# Altium PCB Micro_Card.PcbDoc
Units mm, origin at the board's own origin, x right, y up, seen from the top; angles counter-clockwise.
Board outline 55 x 85 mm, 2 copper layers (Top Layer, Bottom Layer); 44 components, 47 nets, 222 pads, 64 vias.
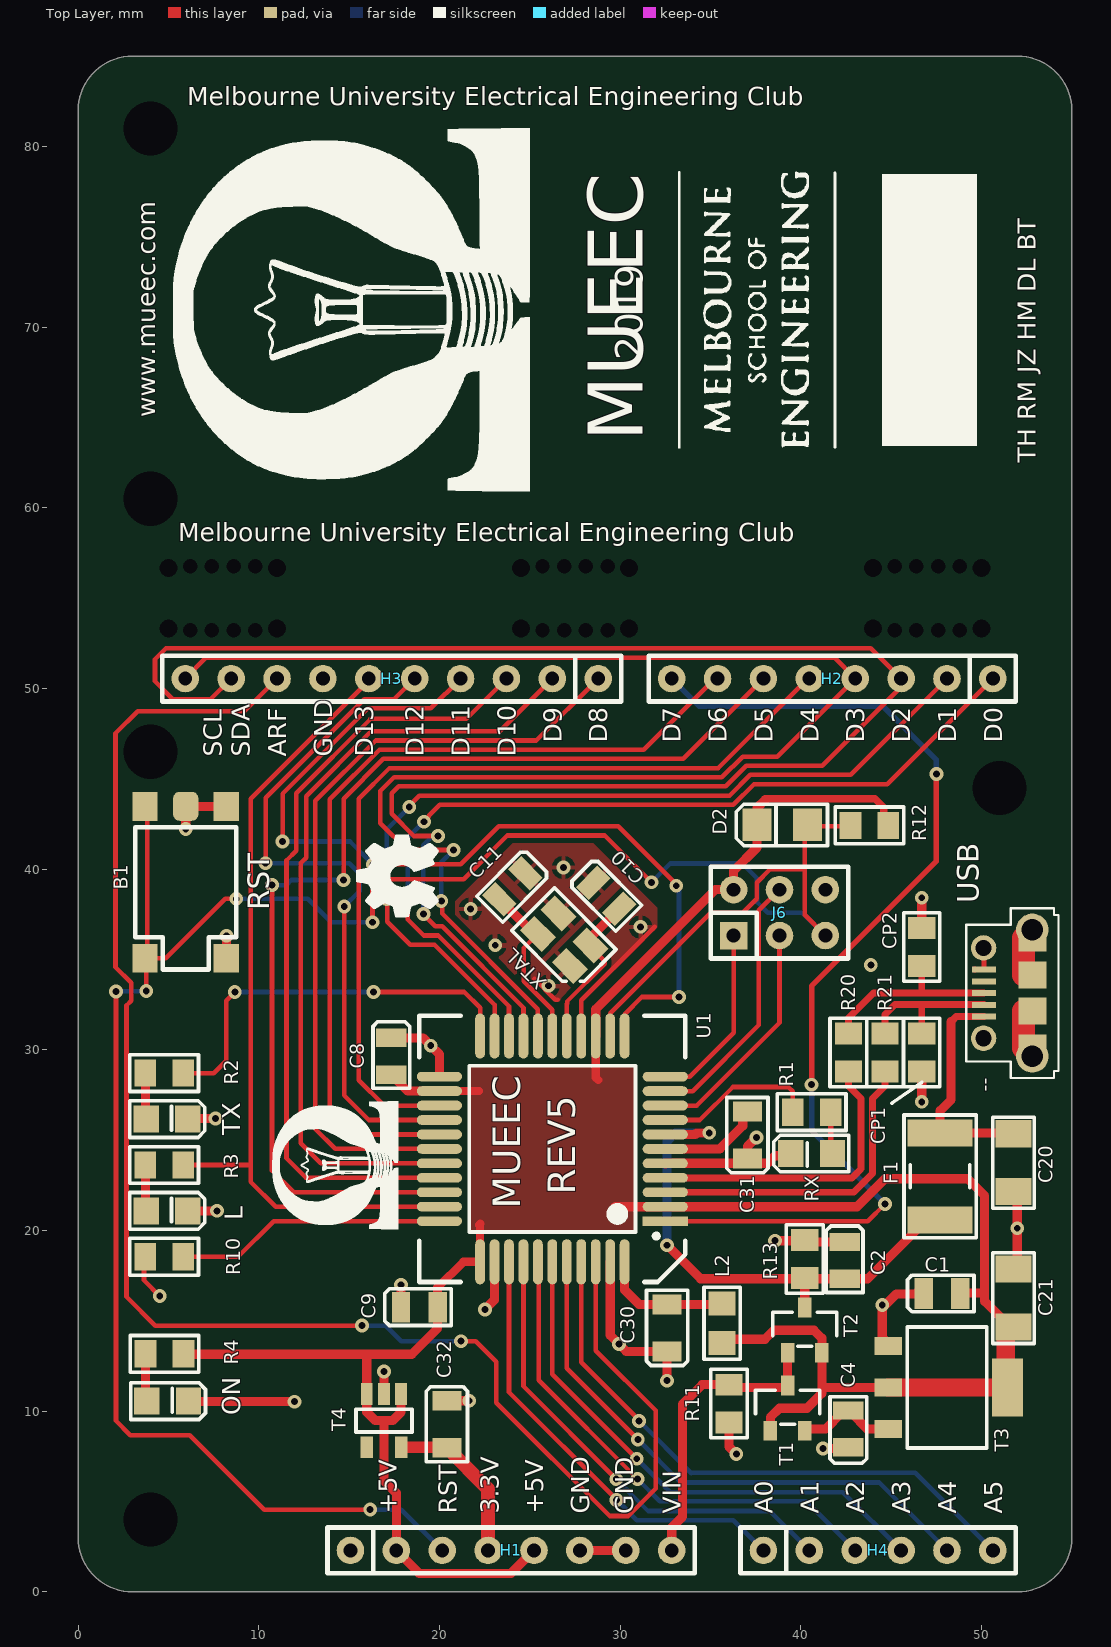
[diagram p0: Top Layer view]
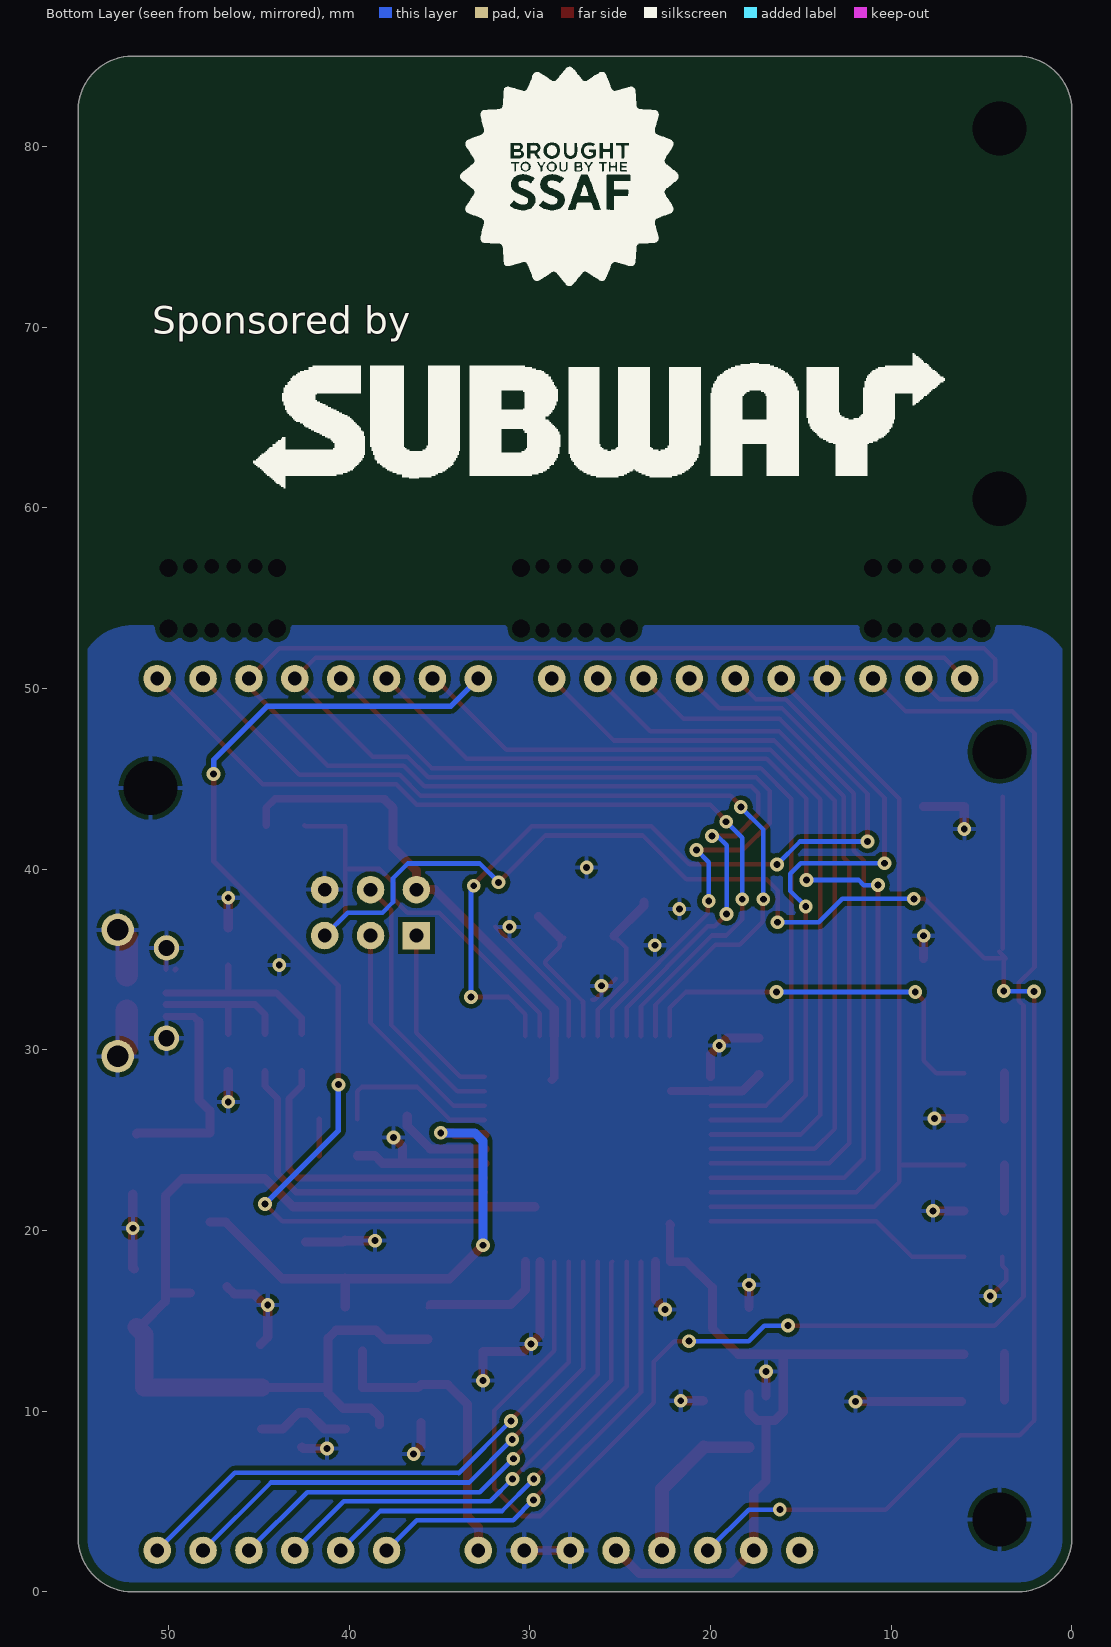
[diagram p1: Bottom Layer view, seen from below]

## Layer stack, top to bottom
Top Solder: solder mask 0.0102, Solder Resist, Dk 3.5
Top Layer: signal copper 0.0356
Dielectric 1: dielectric 0.32, FR-4, Dk 4.8
Bottom Layer: signal copper 0.0356
Bottom Solder: solder mask 0.0102, Solder Resist, Dk 3.5

## Board outline
0,3 0,82 cw(c3,82) 3,85 52,85 cw(c52,82) 55,82 55,3 cw(c52,3) 52,0 3,0 cw(c3,3)

## Design rules (kind name [scope] priority, off if disabled: settings)
BoardOutlineClearance [All] p1: gap=1.016 ignorepadtopadclearanceinfootprint=FALSE
Clearance [All] p1: gap=0.254 ignorepadtopadclearanceinfootprint=FALSE except(0: Arc-Hole Track-Hole SMDPad-Hole THPad-Hole Via-Hole Fill-Hole Poly-Hole Region-Hole Text-Hole)
DiffPairsRouting [All] p1: maxlimit=0.254 minlimit=0.254 mostfreqgap=0.254 toplayer_minwidth=0.381 toplayer_maxwidth=0.381 toplayer_prefwidth=0.381 bottomlayer_minwidth=0.381 bottomlayer_maxwidth=0.381 bottomlayer_prefwidth=0.381 maxuncoupledlength=12.7
HoleSize [All] p1: absolutevalues=TRUE maxlimit=254 minlimit=0.025 maxpercent=80.000 minpercent=20.000
PolygonConnect [All] p1: connectstyle=Relief reliefconductorwidth=0.254 reliefentries=4 polygonreliefangle="90 Angle" airgapwidth=0.254
RoutingVias [All] p1: holewidth=0.508 width=1.016 viastyle="Through Hole" minholewidth=0.508 minwidth=1.016 maxholewidth=0.635 maxwidth=5.08
SolderMaskExpansion [All] p1: expansion=0.102
Width [All] p1: maxlimit=25.4 minlimit=0.254 preferedwidth=0.254 minimp=50.000000 maximp=50.000000 favimp=50.000000
28 further rules are at their usual default settings.

## Classes and differential pairs
differential pair USB: +USB_P -USB_N
differential pair RD: +RD_P -RD_N

## Components (designator, comment, footprint, x,y, rotation, side; value= is the part's Value field where it differs from the comment)
-- "USB_Micro_Connector" USB_micro_through 52.789,33.166 r90 top
B1 "off-mom" 450-1760 5.951,39.272 r90 top value=NA
C1 "0.10µ" R15_0805_cap_M 47.811,16.514 r0 top value=0.10µF
C2 "0.10µ 25V" R15_0805_cap_M 42.426,18.343 r270 top value=0.10µF
C4 "0.10µF ±10% 25V Ceramic Capacitor X7R 0805 (2012 Metric)" R15_0805_cap_M 42.629,9.021 r90 top value=0.10µF
C8 "0.10µ" R15_0805_cap_M 17.331,29.646 r270 top value=0.10µF
C9 "0.10µ" R15_0805_cap_M 18.88,15.752 r0 top value=0.10µF
C10 "22pF" R15_0805_cap_M 29.218,38.536 r315 top
C11 "22pF" R15_0805_cap_M 24.036,39.044 r225 top
C20 "22µF 25V cap" X5R_22uF_25v_1206_X_M 51.773,23.753 r90 top value=22uF
C21 "22µF" X5R_22uF_25v_1206_X_M 51.773,16.26 r270 top value=22uF
C30 "1µF" C2012_M 32.596,14.609 r90 top value=1uF
C31 "1µF" C2012_M 37.041,25.277 r90 top value=1uF
C32 "1µF" C2012_M 20.404,9.275 r270 top value=1uF
CP1 "Gard Resistor" "UltraGuard 0805" 46.693,29.849 r270 top value=NA
CP2 "Gard Resistor" "UltraGuard 0805" 46.693,35.691 r90 top value=NA
D2 "100V Diode" CD1206-S01575 38.971,42.447 r0 top value=NA
F1 "MF-MSF0502" MF-MSMF050_M 47.709,22.991 r270 top value=NA
H1 "H8" H8 23.96,2.29 r0 top value=NA
H2 "H8" H8 41.74,50.55 r180 top value=NA
H3 "H10" H10 17.356,50.55 r180 top value=NA
H4 "H6" H6 44.28,2.29 r0 top value=NA
J6 "J3*2" J3*2 38.819,37.596 r90 top value=NA
L "LED_L" "Wurth led 0805" 4.91,21.086 r180 top value=NA
L2 "MH2029 - 300Y" MH2029-300YC 35.644,14.863 r270 top value=NA
ON "LED_ON" "Wurth led 0805" 4.95,10.55 r180 top value=NA
R1 "Res" RNCP0805_M 40.597,26.547 r180 top value=1K
R2 "Res" RNCP0805_M 4.76,28.706 r0 top value=1K
R3 "Res" RNCP0805_M 4.76,23.626 r0 top value=1K
R4 "1K" RNCP0805_M 4.775,13.175 r180 top
R10 "10K" RNCP0805_M 4.76,18.546 r0 top
R11 "Res" RNCP0805_M 36.025,10.418 r90 top value=10K
R12 "Res" RNCP0805_M 43.797,42.422 r180 top value=10K
R13 "10K" RNCP0805_M 40.216,18.419 r270 top
R20 "22" RNCP0805_M 42.629,29.849 r90 top
R21 "22" RNCP0805_M 44.661,29.849 r90 top
RX "_RX" "Wurth led 0805" 40.597,24.261 r0 top
T1 "PMV48XP" PMV48XP_SOT23 39.266,10.164 r90 top
T2 "PMV48XP" PMV48XP_SOT23 40.216,14.482 r90 top
T3 "NCP1117-5" NCP1117_SOT223 48.09,11.307 r0 top
T4 "LP2985-33DBVR" LP2985_SOT23_M 16.924,9.478 r270 top
TX "LED_TX" "Wurth led 0805" 4.91,26.166 r180 top
U1 "ATmega32U4" ATmega32u4_TQFP44 26.246,24.515 r180 top locked
XTAL "16 MHz Crystal" TSX-3225 26.9,36.097 r315 top

## Footprints (in the part's own frame and the unit in brackets; to place one, negate y for a bottom-side part, rotate by r counter-clockwise, add the part's x,y. Pads: shape width x height; smd on the part's side, far side on the other; paste and mask are expansions set on the pad)
450-1760 [mm] "Button off-mom"
  rect 1.6x1.4 smd: 1(4.205,2.25) 2(-4.205,2.25) 3(4.205,-2.25) 4(-4.205,-2.25)
  rrect50% 1.6x1.4 smd: 5(4.205,0)
  silkscreen extent -4.83,-2.79 3.05,2.79, body extent -3.1,-3 3.1,3, height 3.1
ATmega32u4_TQFP44 [mm] "ATmega32u4_TQFP44_M"
  rect 2.5x0.54 smd: 1(-6.25,4)
  oval 2.5x0.54 smd: 2(-6.25,3.2) 3(-6.25,2.4) 4(-6.25,1.6) 5(-6.25,0.8) 6(-6.25,0) 7(-6.25,-0.8) 8(-6.25,-1.6) 9(-6.25,-2.4) 10(-6.25,-3.2) 11(-6.25,-4) 23(6.25,-4) 24(6.25,-3.2) 25(6.25,-2.4) 26(6.25,-1.6) 27(6.25,-0.8) 28(6.25,0) 29(6.25,0.8) 30(6.25,1.6) 31(6.25,2.4) 32(6.25,3.2) 33(6.25,4)
  oval 0.54x2.5 smd: 12(-4,-6.25) 13(-3.2,-6.25) 14(-2.4,-6.25) 15(-1.6,-6.25) 16(-0.8,-6.25) 17(0,-6.25) 18(0.8,-6.25) 19(1.6,-6.25) 20(2.4,-6.25) 21(3.2,-6.25) 22(4,-6.25) 34(4,6.25) 35(3.2,6.25) 36(2.4,6.25) 37(1.6,6.25) 38(0.8,6.25) 39(0,6.25) 40(-0.8,6.25) 41(-1.6,6.25) 42(-2.4,6.25) 43(-3.2,6.25) 44(-4,6.25)
  silkscreen extent -7.37,-7.37 7.37,7.37, body extent -5,-5 5,5, height 1.2
C2012_M [mm] "C2012X7R1H105K125AE"
  rect 1.1x1.6 smd: 1(-1.3,0) 2(1.3,0)
  silkscreen extent -2.08,-1.14 2.08,1.14, body extent -1.22,-0.75 1.23,0.75, height 1.25
CD1206-S01575 [mm] "Switching Chip Diode, 2-Leads, Body 3.20x1.50mm, IPC Medium Density"
  rect 1.6x1.8 smd: 1(-1.4,0) 2(1.4,0)
  silkscreen extent -2.54,-1.14 2.5,1.14, body extent -1.7,-0.85 1.7,0.85, height 0.92
H6 [mil] "header 6*1"
  round 60 hole 30: 1(-250,0) 2(-150,0) 3(-50,0) 4(50,0) 5(150,0) 6(250,0)
  silkscreen extent -300,-50 300,50, body extent -300,-50 300,50, height 335
H8 [mil] "header 8*1"
  round 60 hole 30: 1(-350,0) 2(-250,0) 3(-150,0) 4(-50,0) 5(50,0) 6(150,0) 7(250,0) 8(350,0)
  silkscreen extent -400,-50 400,50, body extent -400,-50 400,50, height 335
H10 [mil] "header 10*1"
  round 60 hole 30: 1(-450,0) 2(-350,0) 3(-250,0) 4(-150,0) 5(-50,0) 6(50,0) 7(150,0) 8(250,0) 9(350,0) 10(450,0)
  silkscreen extent -500,-50 500,50, body extent -500,-50 500,50, height 335
J3*2 [mil] "AVR ISP pinouts 6 pin"
  rect 60x60 hole 30: 1(-50,100)
  round 60 hole 30: 2(50,100) 3(-50,0) 4(50,0) 5(-50,-100) 6(50,-100)
  silkscreen extent -100,-150 100,150, body extent -100,-150 100,150, height 335
LP2985_SOT23_M [mm] "LP2985_SOT23_M"
  rect 1.2x0.65 smd: 1(-1.475,0.95) 2(-1.475,0) 3(-1.475,-0.95)
  rect 1.2x0.7 smd: 4(1.475,-0.95) 5(1.475,0.95)
  silkscreen extent -0.64,-1.55 0.64,1.55, body extent -0.88,-1.52 0.87,1.53, height 1.45
MF-MSMF050_M [mm] "MF-MSMF050_M"
  rect 1.5x3.6 smd: 1(-2.4,0) 2(2.4,0)
  silkscreen extent -3.4,-2 3.4,2, body extent -2.37,-1.71 2.36,1.71, height 0.85
MH2029-300YC [mm] "Ferrite bead 0805"
  rect 1.33x1.5 smd: 1(-1.085,0) 2(1.085,0)
  silkscreen extent -2,-1 2,1, body extent -1.1,-0.7 1.1,0.7, height 1.1
NCP1117_SOT223 [mm] "NCP1117_SOT223_M"
  rect 1.5x1 smd: 1(-3.25,2.3) 2(-3.25,0) 3(-3.25,-2.3)
  rect 1.7x3.2 smd: 4(3.35,0)
  silkscreen extent -2.2,-3.35 2.2,3.35, body extent -1.85,-3.35 1.85,3.35, height 1.8
PMV48XP_SOT23 [mm] "PMV48XP_SOT23_M"
  rect 1.1x0.75 smd: 1(-1.25,0.95) 2(-1.25,-0.95) 3(1.25,0)
  silkscreen extent -0.89,-1.78 1,1.78, body extent -0.7,-1.5 0.7,1.5, height 1.1
R15_0805_cap_M [mil] "R15_cap_M"
  rect 40x66.93 smd: 1(-40,0) 2(40,0)
  silkscreen extent -75,-40 70,40, body extent -45,-30 45,30, height 60
RNCP0805_M [mm] "RNCP0805_M"
  rect 1.2x1.5 smd: 1(-1.05,0) 2(1.05,0)
  silkscreen extent -1.9,-1.02 1.9,1.02, body extent -1.07,-0.7 1.07,0.7, height 0.6
TSX-3225 [mm] "SER4069CT"
  rect 1.7x1.15 smd: 1(-1.25,-0.8) 2(1.25,-0.8) 3(1.25,0.8) 4(-1.25,0.8)
  silkscreen extent -2.41,-1.7 2.41,1.65, body extent -1.6,-1.25 1.6,1.25, height 0.6
"UltraGuard 0805" [mm] "UltraGuard 0805"
  rect 1.2x1.5 smd: 1(-1.05,0) 2(1.05,0)
  silkscreen extent -1.9,-1 1.9,1, body extent -1,-0.63 1,0.62, height 0.7
USB_micro_through [mm]
  rect 0.33x1.35 smd: 1(-1.325,2.65) 2(-0.675,2.65) 3(-0.025,2.65) 4(0.625,2.65) 5(1.275,2.65)
  round 1.8 hole 1.2: 6(-3.525,-0.025) 6(3.475,-0.025)
  rect 1.5x1.55 smd: 6(-3.075,-0.025) 6(-1.025,-0.025) 6(0.975,-0.025) 6(3.025,-0.025)
  round 1.408 hole 0.9: 6(-2.525,2.675) 6(2.475,2.675)
  silkscreen extent -4.72,-1.47 4.67,3.63, body extent -4.04,-2.69 4.01,2.89, height 2.74
"Wurth led 0805" [mm] "Wurth led 0805"
  rect 1.4x1.5 smd: 1(-1.15,0) 2(1.15,0)
  silkscreen extent -2.1,-1.02 2.05,1.02, body extent -1,-0.63 1,0.63, height 0.7
X5R_22uF_25v_1206_X_M [mm] "X5R_22uF_25v_1206_X_M"
  rect 1.5x2 smd: 1(-1.6,0) 2(1.6,0)
  silkscreen extent -2.51,-1.14 2.51,1.14, body extent -1.7,-0.9 1.7,0.9, height 2.29

## Part data
--: library part USB_micro_through, "CONN USB MICRO B RECPT SMT R/A", Manufacturer Part Number=10118194-0001LF, Supplier Part Number 1=609-4618-1-ND, 01 Created By="David Lynch @ 30/11/2017", 02 Reviewed By="Rodrigo Maureira @ 14/01/2018", Digikey URL=https://www.digikey.com.au/product-detail/en/amphenol-fci/10118194-0001LF/609-4618-1-ND/2785382, Supplier 1=Digi-Key
B1: library part Button, "Tactile Button", Supplier Part Number 1=450-1760-1-ND, Details=Button, Mounting Type=SMD, Name="Tactile Button", Supplier 1=Digi-Key, Type=off-mom
C1 C8 C9: library part "0.10µF 25V Cap", "Cap.", Supplier Part Number 1=709-1185-1-ND, Details=0.10µF, Mounting Type=SMD, Name=Cap., Supplier 1=Digi-Key, Type="Ceramic Capacitor"
C2: library part "0.10µF 25V Cap", "Cap.", Supplier Part Number 1=709-1185-1-ND, Voltage Rating=100, Details=0.10µF, Mounting Type=SMD, Name=Cap., Supplier 1=Digi-Key, Type="Ceramic Capacitor"
C4: library part "0.10µF ±10% 25V cap", "Cap.", Supplier Part Number 1=709-1185-1-ND, Details=0.10µF, Mounting Type=SMD, Name=Cap., Supplier 1=Digi-Key, Type="Ceramic Capacitor"
C10 C11: library part "22pF 50V cap", "Cap.", Supplier Part Number 1=709-1172-1-ND, Details=22pF, Mounting Type=SMD, Name=Cap., Supplier 1=Digi-Key, Type="Ceramic Capacitor"
C20: "Cap.", Supplier Part Number 1=490-12451-1-ND, Details=22uF, Mounting Type=SMD, Name=Cap., Supplier 1=Digi-Key, Type="Ceramic Capacitor"
C21: library part "22µF 25V cap", "Cap.", Supplier Part Number 1=490-12451-1-ND, Details=22uF, Mounting Type=SMD, Name=Cap., Supplier 1=Digi-Key, Type="Ceramic Capacitor"
C30 C31 C32: library part "1µF 50V cap", "Cap.", Supplier Part Number 1=1276-3098-1-ND, Details=1uF, Mounting Type=SMD, Name=Cap., Supplier 1=Digi-Key, Type="Ceramic Capacitor"
CP1 CP2: Supplier Part Number 1=478-5584-1-ND, Mounting Type=SMD, Name="Gard Resistor", Supplier 1=Digi-Key
D2: library part "CD1206 - S01575", "Standard Diode", Supplier Part Number 1=CD1206-S01575CT-ND, Voltage Rating=100, Mounting Type=SMD, Name="Standard Diode", Supplier 1=Digi-Key
F1: "Resetable fuse", Supplier Part Number 1=MF-MSMF050-2CT-ND, Mounting Type=SMD, Name="Resetable fuse", Supplier 1=Digi-Key
H1 H2: "Header", Supplier Part Number 1=S7006-ND, Mounting Type=SMD, Name=Header, Supplier 1=Digi-Key
H3: "Header", Supplier Part Number 1=S7043-ND, Mounting Type=SMD, Name=Header, Supplier 1=Digi-Key
H4 J6: "Header", Supplier Part Number 1=S7039-ND, Mounting Type=SMD, Name=Header, Supplier 1=Digi-Key
L ON: library part LED, "LED clear", Supplier Part Number 1=732-4982-1-ND, Voltage Rating="BLUE clear", Mounting Type=SMD, Name="LED clear", Supplier 1=Digi-Key
L2: "Ferite Bead", Supplier Part Number 1=MH2029-300YCT-ND, Mounting Type=SMD, Name="Ferite Bead", Supplier 1=Digi-Key
R1 R2 R3: "Res.", Supplier Part Number 1=RNCP0805FTD1K00CT-ND, Details=1K, Mounting Type=SMD, Name=Res., Supplier 1=Digi-Key
R4: library part Res, "Res.", Supplier Part Number 1=RNCP0805FTD1K00CT-ND, Details=1K, Mounting Type=SMD, Name=Res., Supplier 1=Digi-Key
R10 R13: library part Res, "Res.", Supplier Part Number 1=RNCP0805FTD10K0CT-ND, Details=10K, Mounting Type=SMD, Name=Res., Supplier 1=Digi-Key
R11 R12: "Res.", Supplier Part Number 1=RNCP0805FTD10K0CT-ND, Details=10K, Mounting Type=SMD, Name=Res., Supplier 1=Digi-Key
R20 R21: library part Res, "Res.", Supplier Part Number 1=RMCF0805FT22R0CT-ND, Details=22, Mounting Type=SMD, Name=Res., Supplier 1=Digi-Key
RX: library part LED, "LED clear", Supplier Part Number 1=732-4983-1-ND, Voltage Rating="GREEN clear", Mounting Type=SMD, Name="LED clear", Supplier 1=Digi-Key
T1 T2: "P type MOSFET", Supplier Part Number 1=1727-5907-1-ND, Mounting Type=SMD, Name="P type MOSFET", Supplier 1=Digi-Key
T3: "5V reg", Supplier Part Number 1=NCP1117ST50T3GOSCT-ND, Mounting Type=SMD, Name="5V reg", Supplier 1=Digi-Key
T4: "3.3V reg", Supplier Part Number 1=296-18476-1-ND, Mounting Type=SMD, Name="3.3V reg", Supplier 1=Digi-Key
TX: library part LED, "LED clear", Supplier Part Number 1=732-4987-1-ND, Voltage Rating="YELLOW clear", Mounting Type=SMD, Name="LED clear", Supplier 1=Digi-Key
U1: Supplier Part Number 1=ATMEGA32U4-AU-ND, Mounting Type=SMD, Name=ATmega32U4, Supplier 1=Digi-Key
XTAL: "Crystal", Supplier Part Number 1=SER4069CT-ND, Mounting Type=SMD, Name=Crystal, Supplier 1=Digi-Key

## Free pads (board coordinates)
  round 1.524 hole 3 unplated: 0(4,4) 0(4,46.5) 0(4,60.5) 0(4,81) 0(51,44.5)
  round 0 hole 1 unplated paste+0 mask+0: 1(5,53.325) 1(5,56.675) 1(11,53.325) 1(11,56.675) 1(24.5,53.325) 1(24.5,56.675) 1(30.5,53.325) 1(30.5,56.675) 1(44,53.325) 1(44,56.675) 1(50,53.325) 1(50,56.675)
  round 0 hole 0.8 unplated paste+0 mask+0: 1(6.2,53.225) 1(6.2,56.775) 1(7.4,53.225) 1(7.4,56.775) 1(8.6,53.225) 1(8.6,56.775) 1(9.8,53.225) 1(9.8,56.775) 1(25.7,53.225) 1(25.7,56.775) 1(26.9,53.225) 1(26.9,56.775) 1(28.1,53.225) 1(28.1,56.775) 1(29.3,53.225) 1(29.3,56.775) 1(45.2,53.225) 1(45.2,56.775) 1(46.4,53.225) 1(46.4,56.775) 1(47.6,53.225) 1(47.6,56.775) 1(48.8,53.225) 1(48.8,56.775)

## Via types
v1: diameter 0.762, hole 0.381, Top Layer to Bottom Layer, tented both sides, 64 vias

## Nets (pads, with @x,y where several pads share a name; then routed paths per layer and width w, separated by ;. In a path a pad name is that pad's centre, name@x,y a point inside that pad or via, vN(x,y) a via of type N, cw(c..) or ccw(c..) an arc to the next point about the centre after c; other vN are vias at no path point)
3V3: C32.2 H1.4 T4.5 | length 9.2
  Top Layer w0.635: T4.5 C32.2@20.376,8.003
  Top Layer w0.762: C32.2@20.376,8.003 C32.2 22.69,5.689 H1.4
+5V: C1.2 C8.2 C9.2 C21.2 D2.1 H1.2 H1.5 J6.2 L2.2 R4.1 R12.1 T1.1 T2.2 T3.2 T3.4 T4.1 T4.3 U1.2 U1.14 U1.24 U1.34 | length 134.5
  Top Layer w0.406: 38.032,43.895 44.102,43.895 44.585,43.413 R12.1@44.585,42.422
  Top Layer w0.457: 19.896,16.844 21.317,18.265 U1.34 22.246,20.237 22.182,20.301 22.258,20.377 ; U1.24 22.182,27.715 ; U1.14 28.646,28.465 28.786,28.325
  Top Layer w0.508: R4.1@5.96,13.15 15.959,13.15 ; C8.2 18.245,27.715 U1.24 ; T4.1 17.874,9.949 17.408,9.483 16.924,9.483 ; 19.896,16.844 C9.2 19.896,14.584 18.462,13.15 15.959,13.15 ; H1.5 23.96,1.02 18.88,1.02 H1.2 17.61,5.465 16.924,6.151 16.924,9.483 ; U1.14 28.646,32.249 35.263,38.866 J6.2 36.279,39.907 37.571,41.2 D2.1 37.571,43.384 38.032,43.844 ; 29.726,21.315 U1.2 43.112,21.315 44.661,22.864 49.233,22.864 50.173,21.924 50.173,16.082 C21.2@51.443,14.812 ; L2.2@35.644,13.978 38.01,13.978 38.514,14.482 40.724,14.482 41.166,14.04 T2.2 41.166,11.307 ; T1.1@38.316,9.268 38.316,9.661 38.819,10.164 40.343,10.164 41.166,10.987 41.166,11.307 ; T3.2 41.166,11.307 ; C1.2@48.801,16.539 50.122,16.539 ; 15.959,13.15 15.974,13.135 T4.3 15.974,9.949 16.44,9.483 16.924,9.483
  Top Layer w1.016: T3.2 51.34,11.307 51.34,14.227 C21.2
+VIN: C4.2 T1.2 T3.3 | length 5.4
  Top Layer w0.508: T1.2@40.216,9.014 41.37,9.014 42.266,9.91 42.783,9.91 43.679,9.014 44.833,9.014 T3.3
A0: H4.1 U1.36 | length 24.9
  Top Layer w0.254: U1.36 23.846,11.04 v1(29.802,5.084)
  Bottom Layer w0.254: v1(29.802,5.084) 30.92,3.966 36.254,3.966 H4.1
A1: H4.2 U1.37 | length 26.5
  Top Layer w0.254: U1.37 24.646,11.371 v1(29.783,6.234)
  Bottom Layer w0.254: v1(29.783,6.234) 31.543,4.474 38.286,4.474 H4.2
A2: H4.3 U1.38 | length 28
  Top Layer w0.254: U1.38 25.484,18.227 25.484,11.718 v1(30.96,6.242)
  Bottom Layer w0.254: v1(30.96,6.242) 32.195,5.008 40.292,5.008 H4.3
A3: H4.4 U1.39 | length 29.6
  Top Layer w0.254: U1.39 26.246,12.034 v1(30.915,7.365)
  Bottom Layer w0.254: v1(30.915,7.365) 32.764,5.516 42.324,5.516 H4.4
A4: H4.5 U1.40 | length 31.1
  Top Layer w0.254: U1.40 27.046,12.365 v1(30.976,8.435)
  Bottom Layer w0.254: v1(30.976,8.435) 33.362,6.049 44.331,6.049 H4.5
A5: H4.6 U1.41 | length 32.7
  Top Layer w0.254: U1.41 27.846,12.697 31.047,9.496 v1(31.047,9.453)
  Bottom Layer w0.254: v1(31.047,9.453) 33.917,6.583 ; 33.929,6.57 33.917,6.583 ; H4.6 46.337,6.583 33.917,6.583
AREF: H3.8 U1.42 | length 92
  Top Layer w0.254: H3.8 9.206,48.75 3.288,48.75 2.065,47.527 2.065,34.573 2.929,33.71 2.929,32.708 2.675,32.454 2.675,16.336 4.275,14.736 v1(15.705,14.736) ; v1(21.191,13.872) 22.004,13.872 23.147,12.729 23.147,10.469 29.421,4.195 30.437,4.195 31.961,5.719 31.961,10.037 28.646,13.352 U1.42
  Bottom Layer w0.254: v1(15.705,14.736) 17.026,14.736 17.889,13.872 v1(21.191,13.872)
D0: H2.1 U1.20 | length 49.8
  Top Layer w0.254: v1@18.245,38.358 v1(18.245,38.333) 18.245,37.215 19.134,36.326 19.932,36.326 23.846,32.412 U1.20 ; v1(19.134,42.625) 19.413,42.905 19.413,42.955 20.023,43.565 36.263,43.565 37.406,44.708 44.788,44.708 H2.1
  Bottom Layer w0.254: v1(18.245,38.333) 18.245,41.736 v1(19.134,42.625)
D1: H2.2 U1.21 | length 49.2
  Top Layer w0.254: v1@17.102,38.358 17.102,37.088 18.372,35.818 19.722,35.818 23.046,32.494 U1.21 ; v1(18.321,43.438) 18.321,43.514 18.88,44.073 36.052,44.073 37.195,45.216 42.756,45.216 H2.2
  Bottom Layer w0.254: v1(17.077,38.333) 17.077,42.193 v1(18.321,43.438)
D2: H2.3 H3.9 U1.19 | length 97.9
  Top Layer w0.254: H3.9 7.323,49.407 5.24,49.407 4.25,50.398 4.25,51.617 4.859,52.226 43.874,52.226 H2.3 45.55,50.092 41.182,45.724 36.985,45.724 35.842,44.581 17.737,44.581 17.356,44.2 17.356,43.057 18.575,41.838 v1(19.921,41.838) ; v1@19.134,37.469 19.769,36.834 20.143,36.834 24.646,32.331 U1.19
  Bottom Layer w0.254: v1(19.109,37.52) 19.109,41.33 19.617,41.838 v1(19.921,41.838)
D3: H2.4 H3.10 U1.18 | length 86.1
  Top Layer w0.254: H3.10 7.069,51.693 41.867,51.693 H2.4 38.692,46.232 36.774,46.232 35.631,45.089 17.483,45.089 16.721,44.327 16.721,42.549 18.207,41.063 v1(20.772,41.063) ; v1@20.15,38.231 20.15,37.545 25.446,32.249 U1.18
  Bottom Layer w0.254: v1(20.099,38.231) 20.099,40.39 v1(20.772,41.063)
D4: H2.5 U1.25 | length 48.3
  Top Layer w0.254: U1.25 16.93,26.915 15.527,28.318 15.527,31.703 15.527,43.895 17.229,45.597 35.421,45.597 40.374,50.55 H2.5
D5: H2.6 U1.31 | length 60.2
  Top Layer w0.254: v1(10.727,39.12) 10.727,23.321 11.933,22.115 U1.31 ; v1@14.511,39.399 14.689,39.577 14.689,43.906 16.888,46.105 33.485,46.105 H2.6
  Bottom Layer w0.254: v1(10.727,39.12) 11.514,39.12 11.793,39.399 v1(14.689,39.399)
D6: H2.7 U1.27 | length 48.2
  Top Layer w0.254: 13.927,31.754 13.927,26.394 15.007,25.315 U1.27 ; 13.927,31.755 13.927,43.862 16.677,46.613 31.308,46.613 35.245,50.55 H2.7
D7: H2.8 U1.1 | length 58.2
  Top Layer w0.254: U1.1 43.709,20.515 v1(44.661,21.467)
  Top Layer w0.305: v1(40.597,28.071) 40.597,33.532 47.506,40.441 v1(47.506,45.267)
  Bottom Layer w0.305: H2.8 34.374,49.026 44.534,49.026 47.506,46.054 v1(47.506,45.267) ; v1(40.597,28.071) 40.597,25.531 v1(44.661,21.467)
D8: H3.1 U1.28 | length 44
  Top Layer w0.254: U1.28 14.232,24.515 13.127,25.62 13.127,43.781 16.467,47.121 25.358,47.121 H3.1@28.786,50.549
D9: H3.2 U1.29 | length 43.8
  Top Layer w0.254: 12.327,31.754 12.327,24.819 13.432,23.715 U1.29 ; 12.327,31.755 12.327,37.128 ; 12.327,37.128 12.327,37.759 12.327,38.561 12.327,40.339 12.619,40.631 12.619,44.038 16.209,47.629 23.325,47.629 H3.2
D10: H3.3 U1.30 | length 43.6
  Top Layer w0.254: U1.30 12.606,22.915 11.527,23.994 11.527,40.479 12.073,41.025 12.073,44.211 16.177,48.315 21.471,48.315 H3.3
D11: H3.4 U1.12 | length 50.7
  Top Layer w0.254: v1(11.311,41.533) 11.311,44.167 16.042,48.899 19.515,48.899 H3.4 ; v1(16.315,40.263) 21.166,40.263 23.274,42.371 29.889,42.371 33.104,39.156 v1(33.104,39.084) ; U1.12 30.246,31.969 31.199,32.922 v1(33.256,32.922)
  Bottom Layer w0.254: v1(11.311,41.533) 15.045,41.533 v1(16.315,40.263) v1@16.34,40.263 ; v1@33.256,39.084 v1(33.256,32.922) v1@33.358,33.024
D12: H3.5 U1.26 | length 38.5
  Top Layer w0.254: v1(10.371,40.327) 10.371,43.946 15.832,49.407 17.483,49.407 H3.5 ; v1(14.727,37.939) 14.727,27.474 16.086,26.115 U1.26
  Bottom Layer w0.254: v1(10.371,40.327) 15.006,40.327 15.578,39.755 15.578,38.79 v1(14.727,37.939)
D13: H3.6 R3.2 U1.32 | length 45.2
  Top Layer w0.254: R3.2@5.96,23.626 9.558,23.626 ; H3.6 16.086,50.423 9.558,43.895 9.558,23.626 ; U1.32 10.929,21.315 9.558,22.686 9.558,23.626
GND: --.5 --.6 B1.3 B1.4 B1.5 C1.1 C2.1 C4.1 C8.1 C9.1 C10.1 C11.1 C20.1 C21.1 C30.1 C31.1 C32.1 CP1.2 CP2.2 H1.6 H1.7 H3.7 J6.6 L.1 ON.1 pad.0@4,4 pad.0@51,44.5 R10.1 R11.1 R13.1 RX.1 T3.1 T4.2 TX.1 U1.5 U1.15 U1.23 U1.35 U1.43 XTAL.2 XTAL.4 | length 83.6
  Top Layer w0.254: R10.1@3.86,18.546 3.86,18.038 3.64,17.818 3.64,17.242 v1(4.512,16.37) ; 25.255,33.926 v1@25.836,33.345 ; v1(26.036,33.544) v1@25.836,33.345 ; 26.551,32.77 26.406,32.77 25.834,33.342 v1@25.836,33.345 ; U1.15 27.846,32.744 31.91,36.809 ; --.6@50.114,35.641 50.139,35.616 --.5
  Top Layer w0.305: --.5@49.614,34.466 --.5@49.639,34.441
  Top Layer w0.508: v1(5.951,42.229) B1.5 B1.3 ; L.1@5.96,21.086 L.1 v1(7.679,21.086) ; TX.1@5.985,26.191 v1(7.602,26.191) ; ON.1@6.1,10.525 v1(11.975,10.525) ; B1.4 v1(8.201,36.315) ; T4.2@16.924,10.853 T4.2 v1(16.924,12.195) ; C8.1 19.083,30.662 v1(19.515,30.23) 19.996,29.749 U1.23 ; C9.1 v1(17.864,16.993) ; C32.1 v1(21.645,10.575) ; v1(22.512,15.625) 23.046,16.159 U1.35 ; H1.6 H1.7 ; U1.43 29.446,14.203 v1(29.929,13.72) 30.34,13.309 C30.1 v1(32.596,11.688) ; U1.5 U1.5@32.518,23.693 ; U1.5@32.518,23.723 38.154,23.723 38.565,24.134 RX.1@39.547,24.134 ; R11.1 36.025,8.03 v1(36.431,7.624) ; C31.1@37.041,23.85 C31.1 37.041,24.654 ; v1(38.565,19.435) 40.182,19.435 R13.1 ; R13.1@40.326,19.359 C2.1 ; v1(41.232,7.929) 42.553,7.929 C4.1 ; T3.1@44.915,13.682 44.509,14.088 v1(44.509,15.879) 44.686,15.879 45.296,16.489 46.363,16.489 C1.1@46.769,16.895 ; v1(46.693,27.121) CP1.2 ; CP2.2 v1(46.693,38.419) ; C21.1@51.9,17.86 51.976,17.936 v1(51.976,20.121) C20.1@51.976,22.001 ; 37.041,24.654 37.053,24.654 v1(37.549,25.15) 37.537,25.15 37.041,24.654
  Top Layer w1.27: --.6@52.314,30.091 --.6@52.314,32.141 ; --.6@52.314,34.141 --.6@52.314,36.191
  other v1: 43.874,34.7 23.082,35.786 31.123,36.809 21.725,37.799 26.856,40.085
MISO: J6.1 U1.11 | length 10.2
  Top Layer w0.254: U1.11 33.853,28.515 36.279,30.941 J6.1
MOSI: J6.4 U1.10 | length 14.7
  Top Layer w0.254: U1.10 34.018,27.715 37.676,31.373 37.676,37.723 J6.4
NetC30_2: C30.2 L2.1 U1.44 | length 7.4
  Top Layer w0.254: L2.1@35.483,15.909 L2.1@35.644,15.748
  Top Layer w0.508: U1.44 30.246,16.705 31.042,15.909 C30.2 L2.1@35.483,15.909
NetC31_2: C31.2 U1.6 | length 5.4
  Top Layer w0.508: U1.6 35.511,24.515 36.787,25.791 C31.2@36.787,26.323
NetL_2: L.2 R3.1 | length 2.5
  Top Layer w0.508: L.2@3.733,21.086 R3.1@3.733,23.626
NetON_2: ON.2 R4.2 | length 2.7
  Top Layer w0.254: ON.2@3.725,10.625 ON.2
  Top Layer w0.508: ON.2@3.725,10.625 R4.2
NetR1_1: R1.1 RX.2 | length 2
  Top Layer w0.305: RX.2@41.647,24.134 R1.1@41.647,26.166
NetR1_2: R1.2 U1.8 | length 9.4
  Top Layer w0.254: U1.8 34.414,26.115 36.243,27.944 39.302,27.944 39.547,27.699 R1.2 R1.2@39.547,26.166
NetR2_1: R2.1 TX.2 | length 2.5
  Top Layer w0.508: TX.2@3.733,26.166 R2.1@3.733,28.706
NetR2_2: R2.2 U1.22 | length 22
  Top Layer w0.254: R2.2@5.96,28.706 7.501,28.706 8.187,29.392 8.187,32.719 v1(8.669,33.202) ; v1(16.34,33.202) 21.369,33.202 22.246,32.325 U1.22
  Bottom Layer w0.254: v1(8.669,33.202) v1(16.34,33.202)
NetR10_2: R10.2 U1.33 | length 14.9
  Top Layer w0.254: R10.2@5.96,18.546 8.847,18.546 10.816,20.515 U1.33
RD_N: R21.1 U1.3 | length 17.8
  Top Layer w0.254: U1.3 U1.3@32.509,22.102
  Top Layer w0.381: U1.3 42.924,22.115 43.962,23.153 43.962,27.31 44.661,28.009 R21.1
RD_P: R20.1 U1.4 | length 16.8
  Top Layer w0.254: U1.4 U1.4@32.547,22.864
  Top Layer w0.381: U1.4 42.826,22.915 43.327,23.416 43.327,27.31 42.629,28.009 R20.1
RST: B1.1 B1.2 D2.2 H1.3 J6.5 R12.2 U1.13 | length 128.6
  Top Layer w0.254: v1(2.091,33.227) 2.091,9.459 2.875,8.675 6.17,8.675 10.295,4.551 v1(16.162,4.551) ; B1.2 4.845,35.067 8.136,38.358 v1(8.745,38.358) ; v1(3.767,33.253) 3.767,34.966 3.665,35.067 B1.2@4.021,35.423 ; B1.2@3.828,35.601 B1.1@3.828,44.011 ; v1(16.289,37.063) 16.289,38.841 16.899,39.45 21.344,39.45 23.757,41.863 29.142,41.863 v1(31.732,39.272) ; U1.13 29.446,32.033 35.009,37.596 36.787,37.596 37.549,38.358 37.549,39.247 38.311,40.009 40.216,40.009 ; J6.5 40.216,37.469 40.216,40.009 ; R12.2@42.493,42.422 42.443,42.371 40.216,42.371 40.216,40.009
  Bottom Layer w0.254: v1@2.091,33.1 v1(2.091,33.227) 2.116,33.253 v1(3.767,33.253) ; v1(8.745,38.358) 12.708,38.358 14.003,37.063 v1(16.289,37.063) ; v1(16.162,4.551) 17.889,4.551 H1.3 ; v1(31.732,39.272) 32.774,40.314 36.762,40.314 37.574,39.501 37.574,38.18 38.159,37.596 40.089,37.596 J6.5
SCK: J6.3 U1.9 | length 13
  Top Layer w0.254: U1.9 34.234,26.915 38.819,31.5 J6.3
USB_N: --.2 CP1.1 R21.2 | length 8.4
  Top Layer w0.381: R21.2 44.661,31.957 45.205,32.501 46.693,32.501 ; CP1.1 46.693,32.501 ; --.2@50.139,32.501 46.693,32.501
USB_P: --.3 CP2.1 R20.2 | length 10.4
  Top Layer w0.381: R20.2 42.629,31.754 44.026,33.151 46.693,33.151 ; CP2.1 46.693,33.151 ; --.3@50.139,33.151 46.693,33.151
USB_VIN: --.1 C20.2 F1.1 | length 12.4
  Top Layer w0.406: 48.319,31.551 48.608,31.841 --.1
  Top Layer w0.508: 48.319,31.551 48.319,27.233 47.709,26.623 F1.1 51.735,25.391 C20.2
VIN: H1.8 R11.2 T1.3 T2.1 | length 16.7
  Top Layer w0.508: H1.8 32.85,3.56 33.451,4.161 33.451,10.384 34.535,11.468 R11.2 36.186,11.307 39.266,11.307 T1.3 T2.1 T2.1@39.266,13.332
VUSB: C2.2 F1.2 R13.2 T2.3 U1.7 | length 29.4
  Top Layer w0.508: U1.7 34.158,25.315 34.247,25.404 v1(34.933,25.404) ; v1(32.596,19.181) 34.45,17.327 R13.2@40.216,17.327 ; T2.3@40.216,15.759 R13.2@40.216,17.327 ; R13.2 R13.2@40.216,17.327 ; F1.2@47.709,20.464 46.833,20.464 43.696,17.327 C2.2 R13.2@40.216,17.327
  Bottom Layer w0.508: v1(32.596,19.181) 32.596,24.947 33.053,25.404 v1@34.78,25.404
XTAL1: C11.2 U1.17 XTAL.1 | length 9
  Top Layer w0.254: XTAL.1@25.346,36.311 24.671,35.636 24.671,33.786 26.246,32.211 U1.17
  Top Layer w0.508: C11.2@23.683,38.183 23.683,37.974 XTAL.1@25.346,36.311
XTAL2: C10.2 U1.16 XTAL.3 | length 8.4
  Top Layer w0.254: U1.16 27.046,32.519 ; 27.051,32.515 27.051,32.551 27.059,32.56 27.059,32.676 29.142,34.758 29.142,34.911 28.35,35.703 28.35,35.951 XTAL.3@28.096,36.205
  Top Layer w0.508: XTAL.3@28.35,36.205 C10.2@29.53,37.386
pads on no net: --.4 H1.1 T4.4

## Polygon pours and split planes (outlines as drawn)
GND on Top Layer "Top Layer-No Net" (solid, remove dead copper, pour order 2): 20.861,37.469 25.586,32.744 28.024,32.744 32.063,36.783 32.063,37.875 28.507,41.431 24.062,41.431 20.861,38.231
+5V on Top Layer "TOP_VCC" (solid, remove dead copper, pour order 9): 21.649,19.918 30.843,19.918 30.843,29.112 21.649,29.112 21.649,19.994
GND on Bottom Layer "GND_L02_P010" (solid, remove dead copper, pour order 10): 0,3 0,50.5 cw(c3,50.5) 3,53.5 52,53.5 cw(c52,50.5) 55,50.5 55,3 cw(c52,3) 52,0 3,0 cw(c3,3)

## Silkscreen, mask and mechanical layers (free items; w line width, h text height)
Top Overlay:
  drawing of 10090 lines, arcs and shapes, not listed
  text "Melbourne University Electrical Engineering Club" at 6.038,82.28 h1.02
  text "2019" at 31.25,68.183 h1.52 r90
  text "www.mueec.com" at 4.26,65.008 h1.02 r90
  text "MUEEC" at 31.25,63.687 h3.05 r90
  text "TH RM JZ HM DL BT" at 53,62.5 h1.02 r90
  text "Melbourne University Electrical Engineering Club" at 5.53,58.15 h1.02
  text "D9" at 26.754,46.99 h1.02 r90
  text "D8" at 29.294,46.99 h1.02 r90
  text "D7" at 33.358,46.99 h1.02 r90
  text "D6" at 35.898,46.99 h1.02 r90
  text "D5" at 38.438,46.99 h1.02 r90
  text "D4" at 40.978,46.99 h1.02 r90
  text "D3" at 43.518,46.99 h1.02 r90
  text "D2" at 46.058,46.99 h1.02 r90
  text "D1" at 48.598,46.99 h1.02 r90
  text "D0" at 51.138,46.99 h1.02 r90
  text "SCL" at 7.958,46.228 h1.02 r90
  text "SDA" at 9.482,46.228 h1.02 r90
  text "ARF" at 11.514,46.228 h1.02 r90
  text "GND" at 14.054,46.228 h1.02 r90
  text "D13" at 16.34,46.228 h1.02 r90
  text "D12" at 19.134,46.228 h1.02 r90
  text "D11" at 21.674,46.228 h1.02 r90
  text "D10" at 24.214,46.228 h1.02 r90
  text "USB" at 50.224,38.1 h2.03 r90
  text "RST" at 10.955,37.719 h2.03 r90
  text "REV5" at 27.516,21.971 h1.52 r90
  text "MUEEC" at 24.468,21.209 h1.52 r90
  text "+5V" at 17.635,4.318 h1.02 r90
  text "RST" at 20.963,4.318 h1.02 r90
  text "3.3V" at 23.274,4.318 h1.02 r90
  text "+5V" at 25.738,4.318 h1.02 r90
  text "GND" at 28.278,4.318 h1.02 r90
  text "VIN" at 33.358,4.318 h1.02 r90
  text "A0" at 38.438,4.318 h1.02 r90
  text "A1" at 40.978,4.318 h1.02 r90
  text "A2" at 43.518,4.318 h1.02 r90
  text "A3" at 46.058,4.318 h1.02 r90
  text "A4" at 48.598,4.318 h1.02 r90
  text "A5" at 51.138,4.318 h1.02 r90
  text "GND" at 30.716,4.293 h1.02 r90
Bottom Overlay:
  drawing of 2507 lines, arcs and shapes, not listed
  text "Sponsored by" at 50.903,69.64 h1.52
Route Tool Path:
  lines w3: 4.25,55 3,55 ; 11.75,55 23.75,55 ; 31.25,55 43.25,55 ; 50.75,55 53,55 ; 3,55 cw(c3,59.5) -1.5,59.5 -1.5,82 cw(c3,82) 3,86.5 52,86.5 cw(c52,82) 56.5,82 56.5,59.5 cw(c52,59.5) 52,55 cw(c52,50.5) 56.5,50.5 56.5,3 cw(c52,3) 52,-1.5 3,-1.5 cw(c3,3) -1.5,3 -1.5,50.5 cw(c3,50.5) 3,55